# Altium PCB Port Deployable Solar Panel.PcbDoc (part 1 of 2)
Units mm, origin at the board's own origin, x right, y up, seen from the top; angles counter-clockwise.
Board outline 327.5 x 81 mm, 2 copper layers (Top Layer, Bottom Layer), stack 1.58 mm thick; 55 components, 32 nets, 178 pads, 1922 vias.
Unrouted connection lines stored in the file: 43.
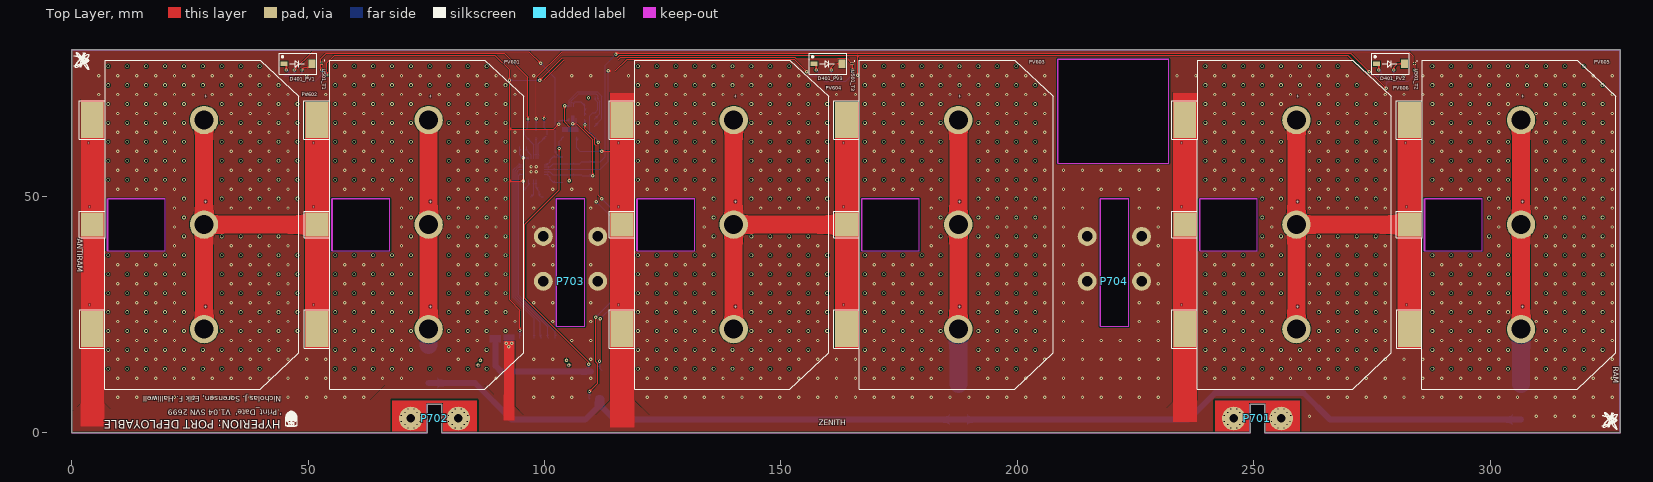
[diagram p0: Top Layer view]
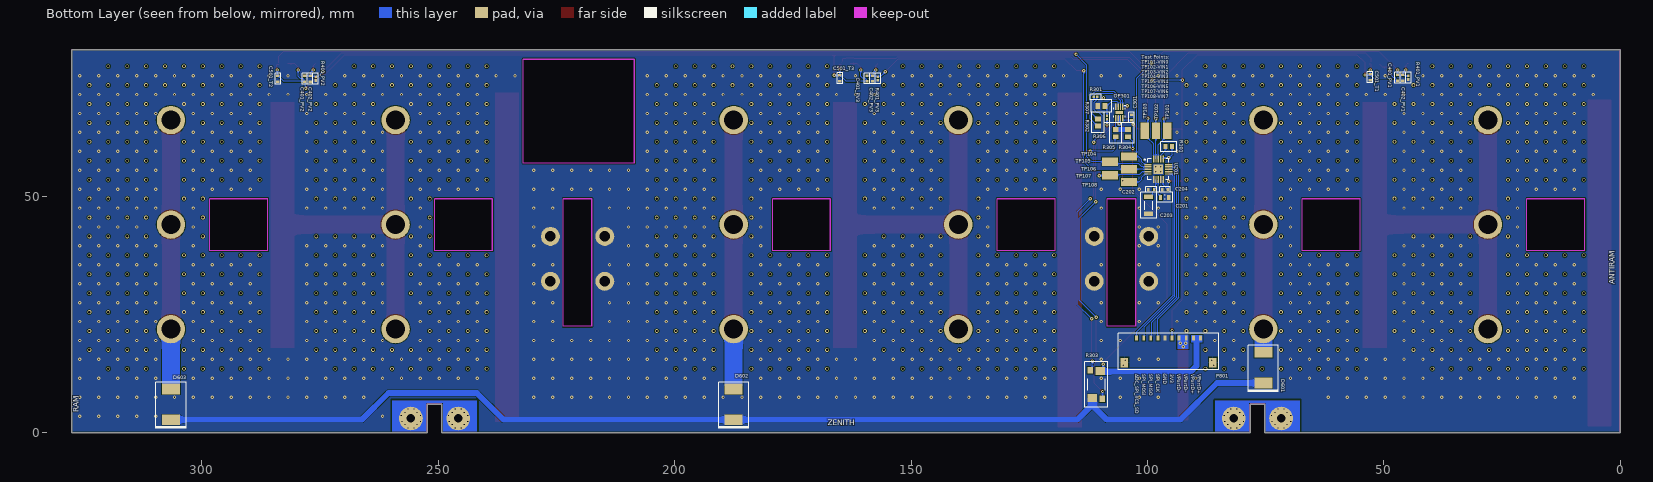
[diagram p1: Bottom Layer view, seen from below]

## Layer stack, top to bottom
Top Solder: solder mask 0.0102, Solder Resist, Dk 3.5
Top Layer: signal copper 0.0711
Dielectric 1: dielectric 1.438, FR-4, Dk 4.8
Bottom Layer: signal copper 0.0711
Bottom Solder: solder mask 0.0102, Solder Resist, Dk 3.5

## Board outline
249.25,0 249.25,6 252.25,6 252.25,0 327.5,0 327.5,81 0,81 0,0 75.25,0 75.25,6 78.25,6 78.25,0
cut-out: 7.6,38.5 19.75,38.5 19.75,49.5 7.6,49.5
cut-out: 55.1,38.5 67.25,38.5 67.25,49.5 55.1,49.5
cut-out: 286.1,38.5 298.25,38.5 298.25,49.5 286.1,49.5
cut-out: 238.6,38.5 250.75,38.5 250.75,49.5 238.6,49.5
cut-out: 167.1,38.5 179.25,38.5 179.25,49.5 167.1,49.5
cut-out: 119.6,38.5 131.75,38.5 131.75,49.5 119.6,49.5
cut-out: 223.5,22.5 223.5,49.5 217.5,49.5 217.5,22.5
cut-out: 108.5,22.5 108.5,49.5 102.5,49.5 102.5,22.5
cut-out: 208.5,79 208.5,57 232,57 232,79

## Design rules (kind name [scope] priority, off if disabled: settings)
BoardOutlineClearance [All] p1: gap=0.254 ignorepadtopadclearanceinfootprint=FALSE except(0: Arc-SplitContinuation Track-SplitContinuation SMDPad-SplitContinuation THPad-SplitContinuation Via-SplitContinuation Fill-SplitContinuation Poly-SplitContinuation Region-SplitContinuation Text-SplitContinuation)
Clearance Clearance_1 [(InComponent('P701') OR InComponent('P702')) vs (InNet('GND') OR OnLayer('Top Layer') OR OnLayer('Bottom Layer'))] p1: gap=0.5 ignorepadtopadclearanceinfootprint=FALSE
Clearance [All] p2: gap=0.152 ignorepadtopadclearanceinfootprint=FALSE
HoleSize [All] p1: absolutevalues=TRUE maxlimit=6 minlimit=0.2 maxpercent=80.000 minpercent=20.000
MinimumAnnularRing [All] p1: minimumring=0.15
MinimumSolderMaskSliver [All] p1: minsoldermaskwidth=0.127
PlaneConnect [All] p1: planeconnectstyle=Direct reliefexpansion=0.508 reliefentries=4 reliefconductorwidth=0.254 reliefairgap=0.254
PolygonConnect [All] p1: connectstyle=Direct reliefconductorwidth=0.254 reliefentries=4 polygonreliefangle="90 Angle" airgapwidth=0.254
RoutingVias [All] p1: holewidth=0.33 width=0.711 viastyle="Through Hole" minholewidth=0.2 minwidth=0.5 maxholewidth=6.2 maxwidth=7
SilkToSilkClearance [All] p1: silktosilkclearance=0
SilkToSolderMaskClearance [IsPad] p1: minsilkscreentomaskgap=0.025 clearancetoexposedcopper=TRUE
SolderMaskExpansion [All] p1: expansion=0.102 istentingtop=FALSE
UnRoutedNet [All] p1: checkbadconnections=TRUE
Width [All] p1: maxlimit=7.62 minlimit=0.203 preferedwidth=0.254
24 further rules are at their usual default settings.

## Classes and differential pairs
component class PV3: C401_PV3 C402_PV3 D401_PV3 R401_PV3
component class PV2: C401_PV2 C402_PV2 D401_PV2 R401_PV2
component class PV1: C401_PV1 C402_PV1 D401_PV1 R401_PV1
channel class Temp_Sensor: T1 T2 T3
channel class Photodiode_Sun_Sensor: T1 T2 T3
component class "Port Deployable": R101 TP101 TP102 TP103 TP104 TP105 TP106 TP107 TP108
component class "Port Deployable Headers": P801
component class "Photovoltaic Array": D601 D602 D603 PV601 PV602 PV603 PV604 PV605 PV606
component class "Mechanical Interfacing": P701 P702 P703 P704
component class T3: C501_T3 U501_T3
component class T2: C501_T2 U501_T2
component class T1: C501_T1 U501_T1
net class VIN[0..7]: VIN0 VIN1 VIN2 VIN3 VIN4 VIN5 VIN6 VIN7
component class "U_AD7298 12-Bit SPI ADC": C201 C202 C203 C204 U201
component class "Current and Voltage Sensors": C301 OP301 R301 R302 R303 R304 R305 R306 R307

## Components (designator, comment, footprint, x,y, rotation, side; value= is the part's Value field where it differs from the comment)
C201 "" TDK-CGA3E 96.35,49.75 r0 bottom value=1µF
C202 "" TDK-CGA2B 99.2,51.4 r0 bottom value=0.1µF
C203 "" TDK-CGA5L 99.75,48.075 r270 bottom value=10µF
C204 "" TDK-CGA2B 96.3,51.4 r0 bottom value=0.1µF
C301 "Cap" TDK-CGA2B 103.35,66.65 r270 bottom value=0.1µF
C401_PV1 "Cap" TDK-CGA2B 47.137,75.061 r270 bottom value=0.1µF (schematic designator C401)
C401_PV2 "Cap" TDK-CGA2B 278.2,74.85 r270 bottom value=0.1µF (schematic designator C401)
C401_PV3 "Cap" TDK-CGA2B 159.3,74.9 r270 bottom value=0.1µF (schematic designator C401)
C402_PV1 "Cap" TDK-CGA2B 45.987,75.061 r90 bottom value=100pF (schematic designator C402)
C402_PV2 "Cap" TDK-CGA2B 277.05,74.85 r90 bottom value=100pF (schematic designator C402)
C402_PV3 "Cap" TDK-CGA2B 158.15,74.9 r90 bottom value=100pF (schematic designator C402)
C501_T1 "Cap" TDK-CGA2B 52.9,75.15 r90 bottom value=0.1µF (schematic designator C501)
C501_T2 "Cap" TDK-CGA2B 283.9,74.85 r90 bottom value=0.1µF (schematic designator C501)
C501_T3 "Cap" TDK-CGA2B 165.05,74.95 r90 bottom value=0.1µF (schematic designator C501)
D401_PV1 "PDB-C160SMCT-ND" PDB-C160SM 44.9,78 r0 top (schematic designator D401)
D401_PV2 "PDB-C160SMCT-ND" PDB-C160SM 275.95,78 r0 top (schematic designator D401)
D401_PV3 "PDB-C160SMCT-ND" PDB-C160SM 157,78 r0 top (schematic designator D401)
D601 "MBRS410L" ONS-875 75.5,13.75 r270 bottom
D602 "MBRS410L" ONS-875 187.5,6 r270 bottom
D603 "MBRS410L" ONS-875 306.5,6 r270 bottom
OP301 "OPA2333" TI-DSG0008A 105.95,67.7 r270 bottom
P701 "Mounting_Hole" DEPHINGE_MOUNTING_HOLE 245.75,3 r0 top
P702 "Mounting_Hole" DEPHINGE_MOUNTING_HOLE 71.75,3 r0 top
P703 "Switch Depressor" SWITCH_DEPRESSOR 105.5,32 r180 top
P704 "Switch Depressor" SWITCH_DEPRESSOR 220.5,32 r180 top
P801 "WM10138CT-ND" MOLX-5040501091 95.55,20 r180 bottom
PV601 "XTJPrime" "XTJ Prime" 75.5,44 r90 top
PV602 "XTJPrime" "XTJ Prime" 28,44 r90 top
PV603 "XTJPrime" "XTJ Prime" 187.5,44 r90 top
PV604 "XTJPrime" "XTJ Prime" 140,44 r90 top
PV605 "XTJPrime" "XTJ Prime" 306.5,44 r90 top
PV606 "XTJPrime" "XTJ Prime" 259,44 r90 top
R101 "Res3" VSH-0603MCT 95.498,60.5 r180 bottom value=10k
R301 "0.1% 1/16W" PANA-ERA2A 110.974,71 r0 bottom value=6.2k
R302 "0.1% 1/8W" PANA-ERA6A 110.476,65.6 r270 bottom value=1M
R303 "Res Sense" VSH-2512R4C 110.8,10.2 r90 bottom value=0.01
R304 "0.1% 1/8W" PANA-ERA6A 104.1,63.35 r90 bottom value=1M
R305 "0.1% 1/8W" PANA-ERA6A 106.7,63.35 r90 bottom value=845k
R306 "0.1% 1/16W" PANA-ERA2A 108.55,66.65 r90 bottom value=6.2k
R307 "0.1% 1/8W" PANA-ERA6A 109.75,69.098 r0 bottom value=1M
R401_PV1 "0.1% 1/16W" PANA-ERA2A 44.837,75.061 r90 bottom value=24k (schematic designator R401)
R401_PV2 "0.1% 1/16W" PANA-ERA2A 275.9,74.85 r90 bottom value=24k (schematic designator R401)
R401_PV3 "0.1% 1/16W" PANA-ERA2A 157,74.9 r90 bottom value=24k (schematic designator R401)
TP101 "5017" KS-5017 95.8,63.826 r270 bottom
TP102 "5017" KS-5017 98.2,63.826 r90 bottom
TP103 "5017" KS-5017 100.6,63.826 r90 bottom
TP104 "5017" KS-5017 103.9,58.4 r180 bottom
TP105 "5017" KS-5017 107.9,57.3 r180 bottom
TP106 "5017" KS-5017 103.9,55.7 r180 bottom
TP107 "5017" KS-5017 107.9,54.4 r180 bottom
TP108 "5017" KS-5017 103.9,53 r180 bottom
U201 "AD7298" ADI-CP-20-8 97.7,55.7 r180 bottom
U501_T1 "LMT70 / 296-47337-1-ND" TI-YFQ0004 52.9,78.15 r270 top (schematic designator U501)
U501_T2 "LMT70 / 296-47337-1-ND" TI-YFQ0004 283.95,78.05 r270 top (schematic designator U501)
U501_T3 "LMT70 / 296-47337-1-ND" TI-YFQ0004 165,78.05 r270 top (schematic designator U501)

## Footprints (in the part's own frame and the unit in brackets; to place one, negate y for a bottom-side part, rotate by r counter-clockwise, add the part's x,y. Pads: shape width x height; smd on the part's side, far side on the other; paste and mask are expansions set on the pad)
ADI-CP-20-8 [mm] "QFN, 20-Leads, Body 4.00x4.00mm, Pitch 0.50mm, Thermal Pad 2.55x2.55mm, IPC Low Density"
  rect 1.5x0.3 smd: 1(-2.2,1) 2(-2.2,0.5) 3(-2.2,0) 4(-2.2,-0.5) 5(-2.2,-1) 11(2.2,-1) 12(2.2,-0.5) 13(2.2,0) 14(2.2,0.5) 15(2.2,1)
  rect 0.3x1.5 smd: 6(-1,-2.2) 7(-0.5,-2.2) 8(0,-2.2) 9(0.5,-2.2) 10(1,-2.2) 16(1,2.2) 17(0.5,2.2) 18(0,2.2) 19(-0.5,2.2) 20(-1,2.2)
  rect 2x2 smd: 21(0,0)
  silkscreen extent -2.98,-2.2 2.2,2.2, body extent -2.07,-2.07 2.07,2.07, height 0.8
DEPHINGE_MOUNTING_HOLE [mm]
  round 5 hole 1.8: 1(0,0) 1(10,0)
  Top Layer region: 3.2,-2.7 3.2,3.3 6.8,3.3 6.8,-2.7 13.9,-2.7 13.9,3.8 -3.9,3.8 -3.9,-2.7
  Top Layer region: 3.2,-3.2
  Bottom Layer region: 3.2,-2.7 3.2,3.3 6.8,3.3 6.8,-2.7 13.9,-2.7 13.9,3.8 -3.9,3.8 -3.9,-2.7
KS-5017 [mil] "Testpoint Lug Mini SMD 27X10X152"
  rect 135x70 smd: 1(0,0)
  body extent -53,-20 53,20, height 60
MOLX-5040501091 [mm]
  rect 0.6x1 smd: 1(-6.75,0) 2(-5.25,0) 3(-3.75,0) 4(-2.25,0) 5(-0.75,0) 6(0.75,0) 7(2.25,0) 8(3.75,0) 9(5.25,0) 10(6.75,0)
  oval 0.711x0.711 hole 0.33 mask+0.102: M1(-9.605,-5.7) M1(-9.105,-4.7) M2(9.105,-4.7) M2(9.605,-5.7)
  rect 1.5x2 smd: M1(-9.355,-5.2) M2(9.355,-5.2)
  silkscreen extent -10.6,-6.7 10.6,1, body extent -9.77,-6.05 9.78,0.39, height 2.01
ONS-875 [mm]
  rect 2.25x3.79 smd: 1(-3.25,0) 2(3.25,0)
  silkscreen extent -4.7,-3.2 5.1,3.2, body extent -3.97,-2.95 3.98,2.95, height 2.32
PANA-ERA2A [mm] "Chip Resistor, 2-Leads, Body 1.00x0.52mm, IPC High Density"
  rect 0.548x0.5 smd: 1(-0.376,0) 2(0.376,0)
  silkscreen extent -1.15,-0.58 1.15,0.58, body extent -0.55,-0.3 0.55,0.3, height 0.4
PANA-ERA6A [mm] "Chip Resistor, 2-Leads, Body 2.00x1.25mm, IPC High Density"
  rect 1x1.25 smd: 1(-0.75,0) 2(0.75,0)
  silkscreen extent -2.15,-1.3 2.15,1.3, body extent -1.1,-0.67 1.1,0.67, height 0.6
PDB-C160SM [mm] "Photodiode"
  rect 1.45x1 smd: 1(0,0)
  rect 1.45x1.8 smd: 2(5.9,0)
  silkscreen extent -1,-2.2 6.9,2.2
SWITCH_DEPRESSOR [mm]
  round 4 hole 2.2: 1(-5.75,0) 1(5.75,0)
  body extent -7.75,-1.99 7.75,6.81, height 16.47
TDK-CGA2B [mm] "Chip Capacitor, 2-Leads, Body 1.00x0.50mm, IPC Low Density"
  rect 0.52x0.72 smd: 1(-0.6,0) 2(0.6,0)
  silkscreen extent -1.15,-0.58 1.15,0.58, body extent -0.52,-0.28 0.53,0.27, height 0.5
TDK-CGA3E [mm] "Chip Capacitor, 2-Leads, Body 1.60x0.80mm, IPC Low Density"
  rect 0.65x1.05 smd: 1(-0.85,0) 2(0.85,0)
  silkscreen extent -1.7,-1.05 1.7,1.05, body extent -0.85,-0.45 0.85,0.45, height 0.8
TDK-CGA5L [mm] "Chip Capacitor, 2-Leads, Body 3.20x1.60mm, IPC Low Density"
  rect 0.95x1.9 smd: 1(-1.775,0) 2(1.775,0)
  silkscreen extent -2.75,-1.7 2.75,1.7, body extent -1.7,-0.9 1.7,0.9, height 1.6
TI-DSG0008A [mm] "SON, 8-Leads, Body 2.00x2.00mm, Pitch 0.50mm, Thermal Pad 1.60x0.69mm, IPC Low Density"
  rect 1.4x0.3 smd: 1(-1.245,0.75) 2(-1.245,0.25) 3(-1.245,-0.25) 4(-1.245,-0.75) 5(1.245,-0.75) 6(1.245,-0.25) 7(1.245,0.25) 8(1.245,0.75)
  rect 0.69x1.6 smd: 9(0,0)
  silkscreen extent -1.5,-1.2 1.05,1.25, body extent -1.05,-1.05 1.05,1.05, height 0.8
TI-YFQ0004 [mm] "BGA, 4-Leads, Body 0.88x0.88mmx0.68mm, Pitch 0.40mm"
  round 0.21 smd: A1(-0.2,0.2) A2(0.2,0.2) B1(-0.2,-0.2) B2(0.2,-0.2)
  silkscreen extent -0.59,0.5 -0.5,0.6, body extent -0.44,-0.44 0.44,0.44, height 0.67
VSH-0603MCT [mm] "Chip Resistor, 2-Leads, Body 1.55x0.85mm, IPC Low Density"
  rect 0.8x1.05 smd: 1(-0.7,0) 2(0.7,0)
  silkscreen extent -1.7,-1.05 1.7,1.05, body extent -0.8,-0.48 0.8,0.48, height 0.55
VSH-2512R4C [mm]
  rect 1.65x2.01 smd: 1(-2.855,0.835) 2(2.855,-0.835)
  rect 1.39x1.14 smd: 3(2.999,1.27) 4(-2.999,-1.27)
  silkscreen extent -4.8,-2.45 4.8,2.45
"XTJ Prime" [mil] "Spectrolab Solar Cell"
  round 236.22 hole 157.48: 1(-870.5,0) 1(0,0) 1(870.5,0)
  rect 300x190 smd: 2(-870.5,930) 2(870.5,930)
  rect 200x190 smd: 2(0,930)
  silkscreen extent -1369,-790 1369,1038, body extent -1356,-778 1356,778, height 13

## Part data
C201: library part PC-TDK-02603, "CAP CER 1UF 25V X7R 0603", Manufacturer Part Number=CGA3E1X7R1E105K080AC, Supplier Part Number 1=445-6931-1-ND, Temperature Coefficient=X7R, Tolerance=±10%, Voltage - Rated=25V, Applications=Automotive, Index=2603, LatestRevisionDate=3/16/2016, LatestRevisionNote=..., PackageReference="0603 (1608 Metric)", Part Number=PC-TDK-02603, Published=3/16/2016, Publisher=AlbertaSat, Supplier 1=Digi-key, Supplier Link=http://www.digikey.ca/product-search/en?keywords=445-6931-1-ND
C202 C204 C401_PV1 C401_PV2 C401_PV3 C501_T1 C501_T2 C501_T3: library part PC-TDK-02259, "CAP CER 0.1UF 50V X7R 0402", Manufacturer Part Number=CGA2B3X7R1H104K050BB, Supplier Part Number 1=445-6899-1-ND, Temperature Coefficient=X7R, Tolerance=±10%, Voltage - Rated=50V, Applications=Automotive, Index=2259, LatestRevisionNote=..., PackageReference="0402 (1005 Metric)", Part Number=PC-TDK-02259, Publisher=AlbertaSat, Supplier 1=Digi-key, Supplier Link=http://www.digikey.ca/product-search/en?keywords=445-6899-1-ND
  C202 C204: LatestRevisionDate=3/16/2016, Published=3/16/2016
  C401_PV1 C401_PV2 C401_PV3 C501_T1 C501_T2 C501_T3: LatestRevisionDate=2016-03-16, PackageDescription="Radial Cap, Thru-Hole; 2 Leads; 0.3 in Pin Spacing", Published=2016-03-16
C203: library part PC-TDK-02917, "CAP CER 10UF 25V X7R 1206", Manufacturer Part Number=CGA5L1X7R1E106K160AC, Supplier Part Number 1=445-6990-1-ND, Temperature Coefficient=X7R, Tolerance=±10%, Voltage - Rated=25V, Applications=Automotive, Index=2917, LatestRevisionDate=3/16/2016, LatestRevisionNote=..., PackageReference="1206 (3216 Metric)", Part Number=PC-TDK-02917, Published=3/16/2016, Publisher=AlbertaSat, Supplier 1=Digi-key, Supplier Link=http://www.digikey.ca/product-search/en?keywords=445-6990-1-ND
C301: library part PC-TDK-02255, "CAP CER 0.1UF 35V X7R 0402", Manufacturer Part Number=CGA2B3X7R1V104K050BB, Supplier Part Number 1=445-6901-1-ND, Temperature Coefficient=X7R, Tolerance=±10%, Voltage - Rated=35V, Applications=Automotive, Index=2255, LatestRevisionDate=2016-03-16, LatestRevisionNote=..., PackageDescription="Radial Cap, Thru-Hole; 2 Leads; 0.3 in Pin Spacing", PackageReference="0402 (1005 Metric)", Part Number=PC-TDK-02255, Published=2016-03-16, Publisher=AlbertaSat, Supplier 1=Digi-key, Supplier Link=http://www.digikey.ca/product-search/en?keywords=445-6901-1-ND
C402_PV1 C402_PV2 C402_PV3: library part PC-TDK-01227, "CAP CER 100PF 50V C0G 0402", Manufacturer Part Number=CGA2B2C0G1H101J050BA, Supplier Part Number 1=445-5596-1-ND, Temperature Coefficient=NP0, Tolerance=±5%, Voltage - Rated=50V, Applications=Automotive, Index=1227, LatestRevisionDate=2016-03-16, LatestRevisionNote=..., PackageDescription="Radial Cap, Thru-Hole; 2 Leads; 0.3 in Pin Spacing", PackageReference="0402 (1005 Metric)", Part Number=PC-TDK-01227, Published=2016-03-16, Publisher=AlbertaSat, Supplier 1=Digi-key, Supplier Link=http://www.digikey.ca/product-search/en?keywords=445-5596-1-ND
D401_PV1 D401_PV2 D401_PV3: library part PXX-ADP-00000, "SENSOR PHOTODIODE 850NM 2SMD GW", Manufacturer Part Number="Advanced Photonics", Index=1, LatestRevisionDate=3/28/2020, LatestRevisionNote=..., PackageReference=PIN2, Part Number=PXX-ADP-00000, Published=3/28/2020, Publisher=AlbertaSat, Supplier 1=Digi-key, Supplier Part Number 1=PDB-C160SMCT-ND
D601 D602 D603: library part PXX-ONS-00003, "SCHOTTKY BARRIER / RECTIFIERS / 4.0 AMPERES, 10 VOLTS, V_F = 0.31V", Supplier Part Number 1=MBRS410LT3-D, Code_JEDEC=DO-214-AA, Index=3, LatestRevisionDate=1/18/2020, LatestRevisionNote=..., Manufacturer Part Number=MBRS410L, PackageDescription="DO-214-AA/SMB; 2 C-Bend Leads; Body 5.3 x 3.6 mm, inc. leads (LxW)", PackageReference=SMB, Part Number=PXX-ONS-00003, Published=1/18/2020, Publisher=AlbertaSat, Supplier 1=Digi-key, Supplier Link=#https://www.digikey.com/product-detail/en/on-semiconductor/MBRS410LT3G/MBRS410LT3GOSCT-ND/1967073#
OP301: library part 73, "CMOS Amplifier 2 Circuit Rail-to-Rail 8-WSON (2x2)", Manufacturer Part Number=OPA2333PIDSGR, Operating Temperature="-55°C ~ 150°C", Supplier Part Number 1=296-51501-1-ND, Voltage - Supply="1.8V ~ 5.5V, ±0.9V ~ 2.75V", PackageReference="8-WFDFN Exposed Pad", Part Number=73, Supplier 1=Digi-Key, Supplier 2=Mouser, Supplier Link=#https://www.digikey.ca/product-detail/en/texas-instruments/OPA2333PIDSGR/296-51501-1-ND/9745865#, Supplier Part Number 2=595-OPA2333PIDSGR
P701 P702: library part PXX-ABS-00003, "Depolyable Hinge Mounting hole.", Manufacturer Part Number=N/A, Index=3, LatestRevisionNote=..., PackageReference=P?, Part Number=PXX-ABS-00003, Publisher=AlbertaSat, Supplier 1=N/A, Supplier Part Number 1=N/A
P703 P704: library part PXX-ABS-00005, "Hardware for depressing the switch", Manufacturer Part Number=Custom, Index=5, LatestRevisionNote=..., Part Number=PXX-ABS-00005, Publisher=AlbertaSat, Supplier 1=Digi-key
P801: library part 69, "CONN HEADER SMD R/A 10POS 1.5MM", Manufacturer Part Number=5040501091, LatestRevisionDate=17-Jul-2002, LatestRevisionNote="Re-released for DXP Platform.", Part Number=69, Publisher="Altium Limited", Supplier 1=Digi-Key, Supplier Link=#https://www.digikey.ca/product-detail/en/molex/5040501091/WM10138CT-ND/4357655#, Supplier Part Number 1=WM10138CT-ND
PV601 PV602 PV603 PV604 PV605 PV606: library part PBT-SPEC-00002, Manufacturer Part Number=Spectrolab, Supplier Part Number 1="UTJ CIC 26.26cm^2", Index=2, LatestRevisionNote=..., PackageReference="3-Connector Solar Cell", Part Number=PBT-SPEC-00002, Publisher=AlbertaSat, Supplier 1=Spectrolab
R101: library part PR-VSH-00143, "RES SMD 10K OHM 1% 1/8W 0603", Manufacturer Part Number=MCT06030C1002FP500, Power - Rated=1/8W, Supplier Part Number 1=MCT0603-10.0K-CFCT-ND, Temperature Coefficient=±50ppm/°C, Tolerance=±1%, Applications="General Purpose", Index=143, LatestRevisionDate=3/14/2016, LatestRevisionNote=..., PackageDescription="Chip Resistor, 2-Leads, Body 1.55x0.85mm, IPC Low Density", PackageReference="0603 (1608 Metric)", Part Number=PR-VSH-00143, Published=3/14/2016, Publisher=AlbertaSat, Supplier 1=Digi-key, Supplier Link=http://www.digikey.ca/product-search/en?keywords=MCT0603-10.0K-CFCT-ND
R301 R306: library part 16853, "RES SMD 6.2K OHM 0.1% 1/16W 0402", Manufacturer Part Number=ERA-2APB622X, Power="0.063W, 1/16W", Supplier Part Number 1=P6.2KCNCT-ND, Temperature Coefficient=±15ppm/°C, Tolerance=±0.1%, LatestRevisionDate=29-May-2009, LatestRevisionNote="IPC-7351 Footprint Added.", PackageDescription="Chip Resistor, 2-Leads, Body 1.00x0.50mm, IPC Low Density", PackageReference="0402 (1005 Metric)", Part Number=16853, Published=8-Jun-2000, Publisher="Altium Limited", Supplier 1=Digi-Key, Supplier Link=http://www.digikey.ca/product-search/en?keywords=P6.2KCNCT-ND
R302 R304 R307: library part 19706, "RES SMD 1M OHM 0.1% 1/8W 0805", Manufacturer Part Number=ERA-6AEB105V, Power="0.125W, 1/8W", Supplier Part Number 1=P1MDACT-ND, Temperature Coefficient=±25ppm/°C, Tolerance=±0.1%, LatestRevisionDate=29-May-2009, LatestRevisionNote="IPC-7351 Footprint Added.", PackageDescription="Chip Resistor, 2-Leads, Body 2.00x1.25mm, IPC Low Density", PackageReference="0805 (2012 Metric)", Part Number=19706, Published=8-Jun-2000, Publisher="Altium Limited", Supplier 1=Digi-Key, Supplier Link=http://www.digikey.ca/product-search/en?keywords=P1MDACT-ND
R303: library part PR-VSH-00237, "RES SMD 0.01 OHM 0.1% 1W 2512", Manufacturer Part Number=Y14870R01000B9W, Power - Rated=1W, Supplier Part Number 1=Y1487-.01-ND, Temperature Coefficient=±15ppm/°C, Tolerance=±0.1%, Applications=Automotive, Index=237, LatestRevisionDate=2017-07-12, LatestRevisionNote=..., PackageReference=VSH-2512R4C, Part Number=PR-VSH-00237, Published=2017-07-12, Publisher=AlbertaSat, Supplier 1=Digi-key, Supplier Link=http://www.digikey.ca/product-search/en?keywords=Y1487-.01-ND
R305: library part 19643, "RES SMD 845K OHM 0.1% 1/8W 0805", Manufacturer Part Number=ERA-6AEB8453V, Power="0.125W, 1/8W", Supplier Part Number 1=P845KDACT-ND, Temperature Coefficient=±25ppm/°C, Tolerance=±0.1%, LatestRevisionDate=29-May-2009, LatestRevisionNote="IPC-7351 Footprint Added.", PackageDescription="Chip Resistor, 2-Leads, Body 2.00x1.25mm, IPC Low Density", PackageReference="0805 (2012 Metric)", Part Number=19643, Published=8-Jun-2000, Publisher="Altium Limited", Supplier 1=Digi-Key, Supplier Link=http://www.digikey.ca/product-search/en?keywords=P845KDACT-ND
R401_PV1 R401_PV2 R401_PV3: library part 17830, "RES SMD 24K OHM 0.1% 1/16W 0402", Manufacturer Part Number=ERA-2APB243X, Power="0.063W, 1/16W", Supplier Part Number 1=P24KCNCT-ND, Temperature Coefficient=±15ppm/°C, Tolerance=±0.1%, LatestRevisionDate=29-May-2009, LatestRevisionNote="IPC-7351 Footprint Added.", PackageDescription="Chip Resistor, 2-Leads, Body 1.00x0.50mm, IPC Low Density", PackageReference="0402 (1005 Metric)", Part Number=17830, Published=8-Jun-2000, Publisher="Altium Limited", Supplier 1=Digi-Key, Supplier Link=http://www.digikey.ca/product-search/en?keywords=P24KCNCT-ND
TP101 TP102 TP103 TP104 TP105 TP106 TP107 TP108: library part PTP-KS-00001, "PC TEST POINT MINI SMD", Supplier Part Number 1=36-5017CT-ND, Index=1, LatestRevisionDate=3/15/2016, LatestRevisionNote=..., Manufacturer Part Number=5017, PackageDescription="Testpoint Lug Mini SMD 27X10X152", PackageReference=KS-5017, Part Number=PTP-KS-00001, Published=3/15/2016, Publisher=AlbertaSat, Supplier 1=Digi-key, Supplier 2=Newark, Supplier 3=Mouser, Supplier Link=http://www.digikey.ca/product-detail/en/keystone-electronics/5017/36-5017TR-ND/2217304
U201: library part PU-ADI-00007, "IC ADC 12BIT SAR 20LFCSP-WQ", Manufacturer Part Number=AD7298BCPZ, Supplier Part Number 1=AD7298BCPZ-ND, Index=7, LatestRevisionDate=7/16/2019, LatestRevisionNote=..., PackageDescription="QFN, 20-Leads, Body 4.00x4.00mm, Pitch 0.50mm, Thermal Pad 2.55x2.55mm, IPC Low Density", PackageReference="20-WFQFN Exposed Pad", Part Number=PU-ADI-00007, Published=7/16/2019, Publisher=AlbertaSat, Supplier 1=Digi-key, Supplier 2=Mouser, Supplier Link=#https://www.digikey.ca/product-detail/en/analog-devices-inc/AD7298BCPZ/AD7298BCPZ-ND/2507320#, Supplier Part Number 2=584-AD7298BCPZ
U501_T1 U501_T2 U501_T3: library part 70, "Temperature Sensor Analog, Local -55°C ~ 150°C 5.194mV/°C 4-DSBGA (0.81x0.81)", Manufacturer Part Number=LMT70YFQR, Operating Temperature="-55°C ~ 150°C", Supplier Part Number 1=296-47337-1-ND, PackageReference="BGA, 4-Leads, Body 0.88x0.88mmx0.68mm, Pitch 0.40mm", Part Number=70, Supplier 1=Digi-Key, Supplier Link=#https://www.digikey.ca/product-detail/en/texas-instruments/LMT70YFQR/296-47337-1-ND/7688347#

## Free pads (board coordinates)
  round 4 hole 2.2: 3(99.75,41.5) 3(111.25,41.5) 3(214.75,41.5) 3(226.25,41.5)

## Via types
v1: diameter 0.711, hole 0.3, Top Layer to Bottom Layer, tented both sides, 1015 vias
v2: diameter 0.8, hole 0.5, Top Layer to Bottom Layer, 858 vias
v3: diameter 0.655, hole 0.25, Top Layer to Bottom Layer, 48 vias
v4: diameter 0.711, hole 0.3, Top Layer to Bottom Layer, 1 vias

## Nets (pads, with @x,y where several pads share a name; then routed paths per layer and width w, separated by ;. In a path a pad name is that pad's centre, name@x,y a point inside that pad or via, vN(x,y) a via of type N, cw(c..) or ccw(c..) an arc to the next point about the centre after c; other vN are vias at no path point)
3V3: C204.1 C301.2 C401_PV1.2 C401_PV2.2 C401_PV3.2 C501_T1.2 C501_T2.2 C501_T3.2 D401_PV1.2 D401_PV2.2 D401_PV3.2 OP301.8 P801.6 R101.2 U201.10 U201.16 U501_T1.A2 U501_T1.B2 U501_T2.A2 U501_T2.B2 U501_T3.A2 U501_T3.B2 | length 375.9
  Top Layer w0.203: v1(52.9,76.7) 52.7,76.9 U501_T1.B2@52.7,77.95 U501_T1.A2@53.1,77.95 ; U501_T3.B2@164.8,77.85 U501_T3.A2@165.2,77.85 v1@165.2,76.85 ; U501_T2.B2@283.75,77.85 U501_T2.A2@284.15,77.85 v1@284.15,76.85
  Top Layer w0.254: v1(48.7,76.7) 49.227,77.227 50.202,77.227 50.8,77.825 D401_PV1.2@50.8,78 ; v1(54,75.629) 54,78.232 55.6,79.832 89.5,79.832 92.6,76.732 92.6,64.2 ; v4(94.8,21.6) 94.8,25.9 92.6,28.1 92.6,53.2 ; v1(95.498,58.1) v1(95.498,58.1) v1(95.5,53.2) v1(95.5,53.2) 92.6,53.2 ; v1(99,74.55) 103.75,79.3 115.4,79.3 115.913,79.813 166.25,79.813 ; v1(103,65.25) 101.95,64.2 92.6,64.2 ; v1(160.65,76.7) 160.65,77.25 161.4,78 D401_PV3.2@162.9,78 ; v1(165.05,76.7) v1@165.2,76.85 ; v1(166.25,75.55) 166.25,79.813 ; v1(278,72.8) 275.135,75.665 273.948,75.665 269.8,79.813 166.25,79.813 ; v1(279.6,76.7) 279.6,77.25 280.35,78 D401_PV2.2@281.85,78 ; v1(284,76.7) v1@284.15,76.85 ; 92.6,53.2 92.6,64.2
  Bottom Layer w0.254: C401_PV1.2@47.15,74.35 C401_PV1.2@47.25,74.35 ; v1(48.7,76.7) 48.7,75.8 47.911,75.011 47.611,75.011 47.383,74.783 47.383,74.483 C401_PV1.2@47.25,74.35 ; v1(52.9,76.7) 52.875,76.675 C501_T1.2@52.875,75.575 ; v1(54,75.629) 53.96,75.59 52.89,75.59 C501_T1.2@52.875,75.575 ; v1(92.6,74.55) v1(99,74.55) ; R101.2@94.798,60.5 94.798,58.8 v1(95.498,58.1) 96.698,58.1 96.7,58.098 U201.16@96.7,57.9 ; P801.6@94.8,20 v4(94.8,21.6) ; v1(95.5,53.2) 95.587,53.113 95.587,51.513 C204.1@95.7,51.4 96.7,52.4 U201.10@96.7,53.5 ; v1(103,65.25) 103,65.374 103.117,65.491 103.117,65.917 103.25,66.05 C301.2@103.35,66.05 105.198,66.05 105.2,66.052 OP301.8@105.2,66.455 ; C401_PV3.2@159.137,74.167 159.27,74.3 C401_PV3.2@159.317,74.3 ; v1(160.65,76.7) 160.65,75.361 160.189,74.9 159.65,74.9 159.45,74.7 159.45,74.433 C401_PV3.2@159.317,74.3 ; v1(165.05,76.7) C501_T3.2@165.05,75.55 ; v1(166.25,75.55) C501_T3.2@165.05,75.55 ; v1(278,72.8) 278.087,72.887 278.087,74.167 278.22,74.3 C401_PV2.2@278.267,74.3 ; v1(279.6,76.7) 279.6,75.361 279.089,74.85 278.55,74.85 278.4,74.7 278.4,74.433 C401_PV2.2@278.267,74.3 ; v1(284,76.7) 284,75.55 283.9,75.55 282.65,74.3 C401_PV2.2@278.267,74.3 ; C401_PV1.2@47.25,74.35 51.55,74.35 52.75,75.55 52.85,75.55 C501_T1.2@52.875,75.575 ; C401_PV3.2@159.317,74.3 163.7,74.3 164.95,75.55 C501_T3.2@165.05,75.55
ADC_SPI_nCS_PD: P801.1 U201.11 | length 38.6
  Bottom Layer w0.254: U201.11@95.5,54.7 94.879,54.7 94.6,54.421 94.6,29.05 102.3,21.35 P801.1@102.3,20